# EAGLE board X13_Power_Distribution_D1 (EAGLE 9.6.2)
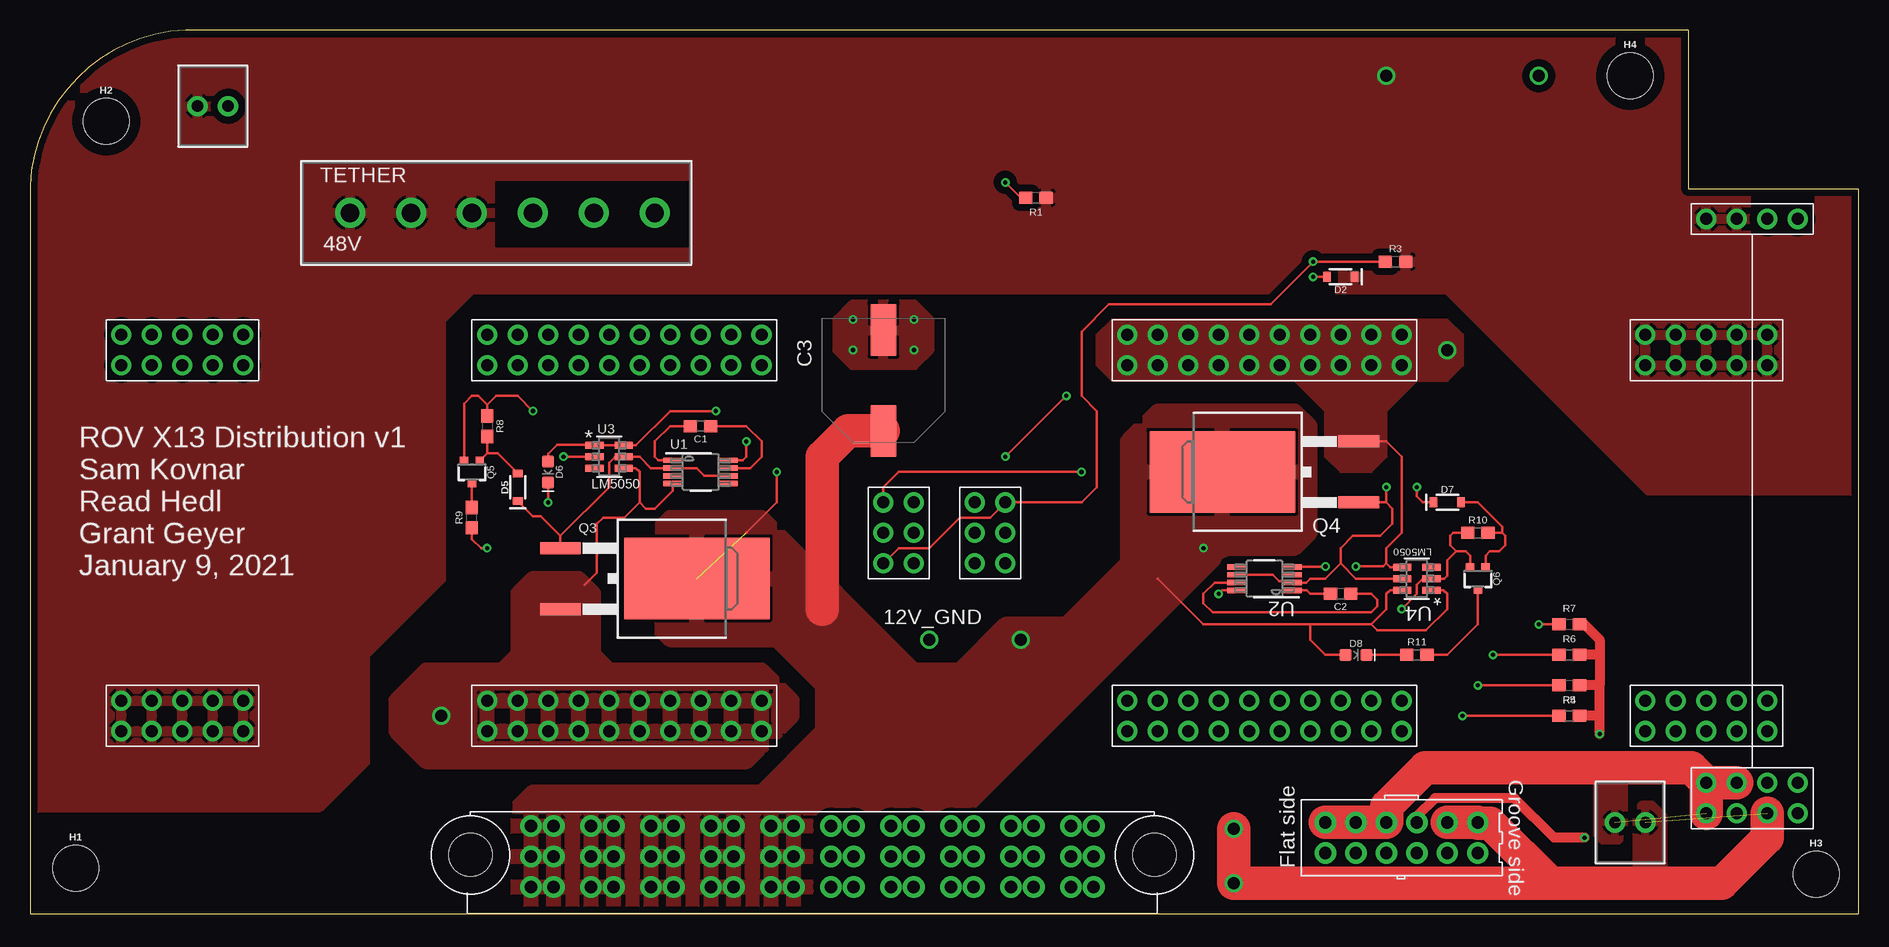
[diagram p0: board, top side]
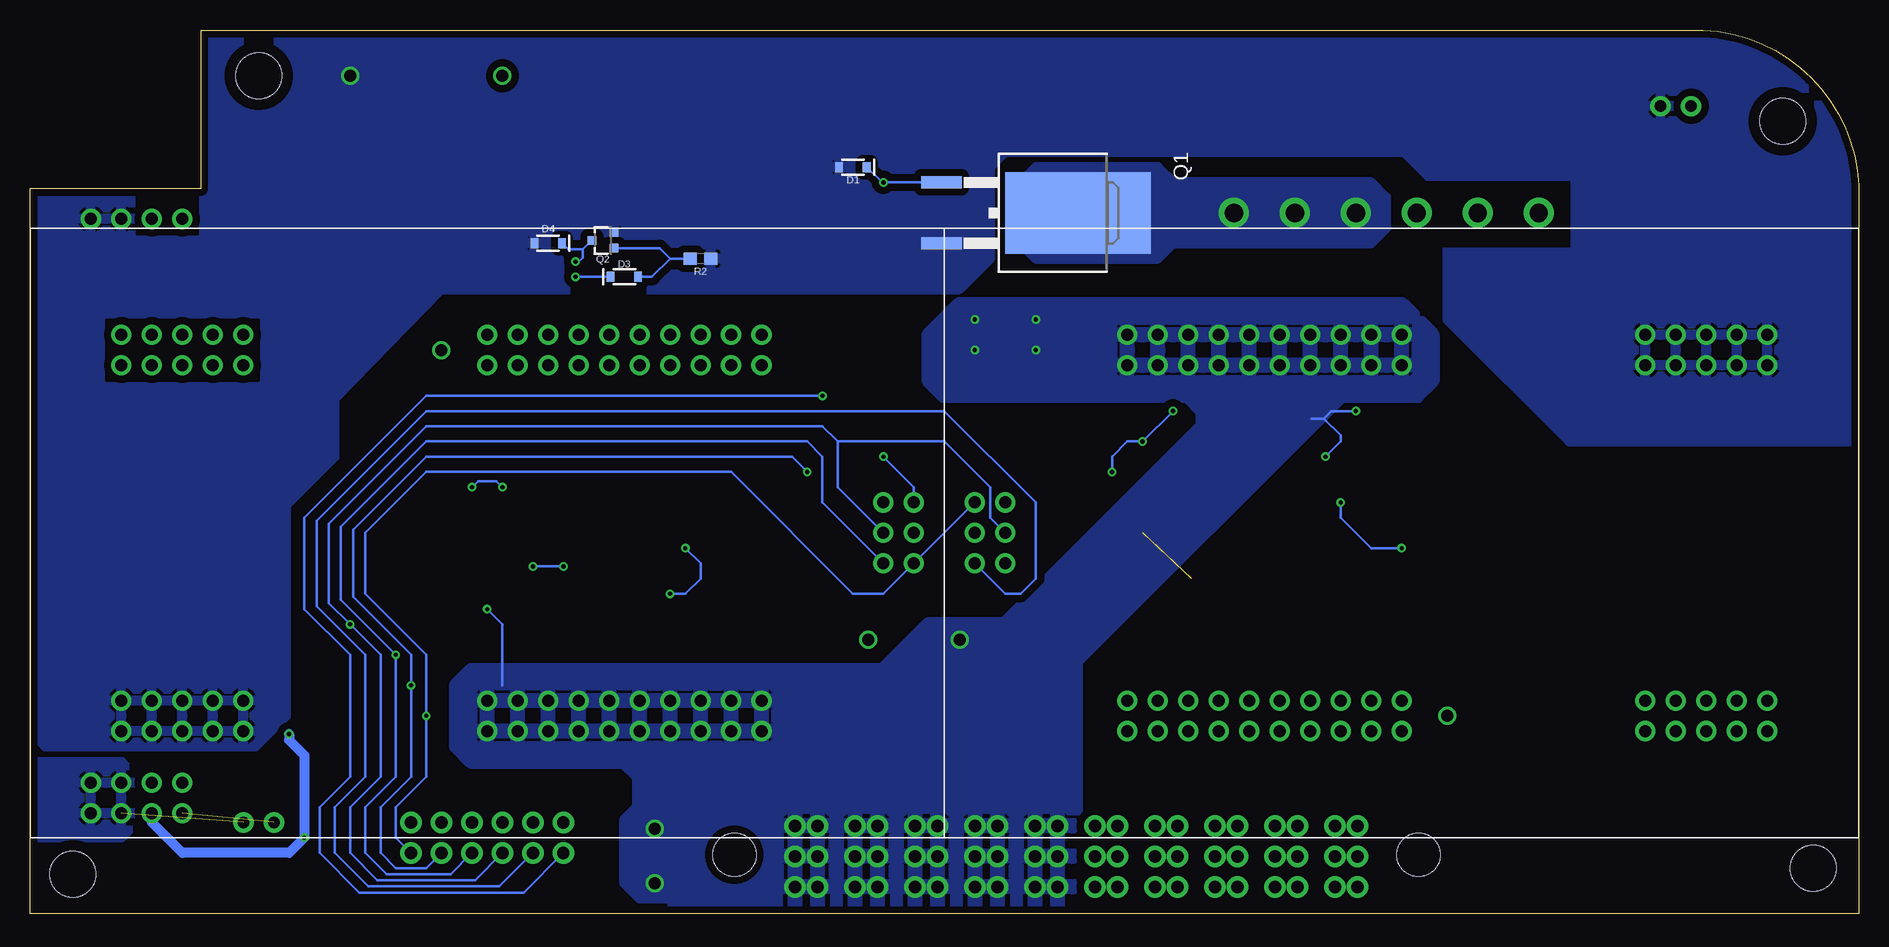
[diagram p1: board, bottom side, seen from below]

Size 152.4 x 73.66 mm. Coordinates in mm from the lower left corner, seen from the top.
Outline: 0,0 152.4,0 152.4,60.45 138.18,60.45 138.18,73.66 14.22,73.66 arc90 0,60.71 0,0
Copper layers (1*16): Top 0.0356mm / dielectric 1.5011mm / Bottom 0.0356mm
Design rules "ECE_Senior_Design": minimum track width 8mil, minimum drill 13mil, track to track 8mil, track to pad 8mil, pad to pad 6mil, via to via 8mil, smd to smd 6mil, copper to edge 15mil, drill to drill 8mil, minimum pad ring 7mil, minimum via ring 7mil, stop-mask expansion 3mil, vias tented up to drill 0mil, thermal gap 10mil
Net classes: 0 default: width 0.203 mm, clearance 0.205 mm

## Footprints (pad centres in the part's own frame; a part is rotated, then mirrored left to right if it is on the bottom)
CONN2_282834-2_TEC = drill 0.965 pad 1.7: 1 0,0; 2 2.54,0
IPL1-106-01-L-D-K = drill 1.016 pad 1.778: 1 0,0; 2 2.54,0; 3 5.08,0; 4 7.62,0; 5 10.16,0; 6 12.7,0; 7 0,-2.54; 8 2.54,-2.54; 9 5.08,-2.54; 10 7.62,-2.54; 11 10.16,-2.54; 12 12.7,-2.54
MPPT-10-01-01-L-RA-SD = drill 1.04 pad 1.8: 1@1 -23.44,2.26; 1@2 -21.56,2.26; 1@3 -23.44,4.8; 1@4 -21.56,4.8; 1@5 -23.44,7.34; 1@6 -21.56,7.34; 2@1 -18.44,2.26; 2@2 -16.56,2.26; 2@3 -18.44,4.8; 2@4 -16.56,4.8; 2@5 -18.44,7.34; 2@6 -16.56,7.34; 3@1 -13.44,2.26; 3@2 -11.56,2.26; 3@3 -13.44,4.8; 3@4 -11.56,4.8; 3@5 -13.44,7.34; 3@6 -11.56,7.34; 4@1 -8.44,2.26; 4@2 -6.56,2.26; 4@3 -8.44,4.8; 4@4 -6.56,4.8; 4@5 -8.44,7.34; 4@6 -6.56,7.34; 5@1 -3.44,2.26; 5@2 -1.56,2.26; 5@3 -3.44,4.8; 5@4 -1.56,4.8; 5@5 -3.44,7.34; 5@6 -1.56,7.34; 6@1 1.56,2.26; 6@2 3.44,2.26; 6@3 1.56,4.8; 6@4 3.44,4.8; 6@5 1.56,7.34; 6@6 3.44,7.34; 7@1 6.56,2.26; 7@2 8.44,2.26; 7@3 6.56,4.8; 7@4 8.44,4.8; 7@5 6.56,7.34; 7@6 8.44,7.34; 8@1 11.56,2.26; 8@2 13.44,2.26; 8@3 11.56,4.8; 8@4 13.44,4.8; 8@5 11.56,7.34; 8@6 13.44,7.34; 9@1 16.56,2.26; 9@2 18.44,2.26; 9@3 16.56,4.8; 9@4 18.44,4.8; 9@5 16.56,7.34; 9@6 18.44,7.34; 10@1 21.56,2.26; 10@2 23.44,2.26; 10@3 21.56,4.8; 10@4 23.44,4.8; 10@5 21.56,7.34; 10@6 23.44,7.34 | hole 3.6: 28.5,4.93; -28.5,4.93
DIST2BRICK_D2 = drill 1 pad 1.676: 1@1 -30.48,-16.51; 1@2 -30.48,-13.97; 1@3 -27.94,-16.51; 1@4 -27.94,-13.97; 1@5 -25.4,-16.51; 1@6 -25.4,-13.97; 1@7 -22.86,-16.51; 1@8 -22.86,-13.97; 1@9 -20.32,-16.51; 1@10 -20.32,-13.97; 2@1 0,-16.51; 2@2 0,-13.97; 2@3 2.54,-16.51; 2@4 2.54,-13.97; 2@5 5.08,-16.51; 2@6 5.08,-13.97; 2@7 7.62,-16.51; 2@8 7.62,-13.97; 2@9 10.16,-16.51; 2@10 10.16,-13.97; 2@11 12.7,-16.51; 2@12 12.7,-13.97; 2@13 15.24,-16.51; 2@14 15.24,-13.97; 2@15 17.78,-16.51; 2@16 17.78,-13.97; 2@17 20.32,-13.97; 2@18 22.86,-13.97; 2@19 22.86,-16.51; 2@20 20.32,-16.51; 3@1 -30.48,13.97; 3@2 -30.48,16.51; 3@3 -27.94,13.97; 3@4 -27.94,16.51; 3@5 -25.4,13.97; 3@6 -25.4,16.51; 3@7 -22.86,13.97; 3@8 -22.86,16.51; 3@9 -20.32,13.97; 3@10 -20.32,16.51; 4@1 0,13.97; 4@2 0,16.51; 4@3 2.54,13.97; 4@4 2.54,16.51; 4@5 5.08,13.97; 4@6 5.08,16.51; 4@7 7.62,13.97; 4@8 7.62,16.51; 4@9 10.16,13.97; 4@10 10.16,16.51; 4@11 12.7,13.97; 4@12 12.7,16.51; 4@13 15.24,13.97; 4@14 15.24,16.51; 4@15 17.78,13.97; 4@16 17.78,16.51; 4@17 20.32,16.51; 4@18 22.86,16.51; 4@19 22.86,13.97; 4@20 20.32,13.97; A 35.56,-2.54; B 33.02,-2.54; C 33.02,0; D 33.02,2.54; E 35.56,2.54; F 35.56,0
0603 = smd 1.1 x 1: 1 -0.85,0; 2 0.85,0
CAPAE1030X1050N = smd 4.3 x 2.15: + -4.2,0; - 4.2,0
DIST2CON = drill 1 pad 1.676: 1@1 -3.81,22.86; 1@2 -1.27,22.86; 2@1 1.27,22.86; 2@2 3.81,22.86; 3@1 -3.81,-26.67; 3@2 -3.81,-24.13; 3@3 -1.27,-24.13; 4 -1.27,-26.67; 5@1 1.27,-26.67; 5@2 1.27,-24.13; 5@3 3.81,-26.67; 5@4 3.81,-24.13
SOD-323 = smd 0.63 x 0.83: A 1.15,0; C -1.15,0
LED-0603 = smd 1 x 1: A -0.877,0; C 0.877,0
6-32-HOLE = hole 3.81: 0,0
TO263 = smd 1 x 3.4: 1 -2.54,-6.6; 2 2.54,-6.6 | smd 6.8 x 12.14: 3 0,4.77
SOT323 = smd 0.7 x 0.7: 1 -0.65,-0.925; 2 0.65,-0.925; 3 0,0.925
CON6_P5MM_VER_TERM-BLK_TYC = drill 1.524 pad 2.5: 1 0,0; 2 5.08,0; 3 10.16,0; 4 15.24,0; 5 20.32,0; 6 25.4,0
DGK0008A_M = smd 1.55 x 0.45: 1 -2.325,0.975; 2 -2.325,0.325; 3 -2.325,-0.325; 4 -2.325,-0.975; 5 2.325,-0.975; 6 2.325,-0.325; 7 2.325,0.325; 8 2.325,0.975
MK06A-M = smd 1.524 x 0.584: 1 -1.219,0.95; 2 -1.219,0; 3 -1.219,-0.95; 4 1.219,-0.95; 5 1.219,0; 6 1.219,0.95

## Placement (x,y rotation side)
5V_POE  POE_TERMINAL  [CONN2_282834-2_TEC]  132.08,7.62 0 top
48V_POE  POE_TERMINAL  [CONN2_282834-2_TEC]  13.97,67.31 0 top
BACKPLANE_LOGIC  IPL1-106-01-L-D-K  [IPL1-106-01-L-D-K]  107.95,7.62 0 top
BACKPLANE_PWR  [MPPT-10-01-01-L-RA-SD]  65.2,0 0 top
BRICK1  DIST2BRICKVER_D2  [DIST2BRICK_D2]  38.1,31.75 0 top
BRICK2  DIST2BRICKVER_D2  [DIST2BRICK_D2]  114.3,31.75 180 top
C1  2.2uF  [0603]  55.88,40.64 180 top
C2  2.2uF  [0603]  109.22,26.67 180 top
C3  330uF  [CAPAE1030X1050N]  71.12,44.45 90 top
CONVERSION  DIST2CON  [DIST2CON]  143.51,35.05 0 top
D1  15V  [SOD-323]  83.82,62.23 180 bottom
D2  22V  [SOD-323]  109.22,53.09 180 top
D3  22V  [SOD-323]  102.87,53.09 0 bottom
D4  5V  [SOD-323]  109.22,55.88 180 bottom
D5  15V  [SOD-323]  40.64,35.56 90 top
D6  [LED-0603]  43.18,36.83 270 top
D7  15V  [SOD-323]  118.11,34.29 0 top
D8  [LED-0603]  110.49,21.59 0 top
H1  6-32-HOLE  [6-32-HOLE]  3.81,3.81 0 top
H2  6-32-HOLE  [6-32-HOLE]  6.35,66.04 0 top
H3  6-32-HOLE  [6-32-HOLE]  148.84,3.3 0 top
H4  6-32-HOLE  [6-32-HOLE]  133.35,69.85 0 top
Q1  IRF1018EPBF  [TO263]  69.85,58.42 270 bottom
Q2  SSM3K341R  [SOT323]  104.65,56.13 90 bottom
Q3  IRF1018EPBF  [TO263]  50.8,27.94 270 top
Q4  IRF1018EPBF  [TO263]  104.14,36.83 90 top
Q5  SSM3K341R  [SOT323]  36.83,36.83 180 top
Q6  SSM3K341R  [SOT323]  120.65,27.94 180 top
R1  1M  [0603]  83.82,59.69 0 top
R2  1M  [0603]  96.52,54.61 180 bottom
R3  10k  [0603]  113.79,54.36 0 top
R4  10k  [0603]  128.27,16.51 0 top
R5  10k  [0603]  128.27,19.05 0 top
R6  10k  [0603]  128.27,21.59 0 top
R7  10k  [0603]  128.27,24.13 0 top
R8  1M  [0603]  38.1,40.64 270 top
R9  470  [0603]  36.83,33.02 90 top
R10  1M  [0603]  120.65,31.75 0 top
R11  470  [0603]  115.57,21.59 0 top
TETHER  48V  [CON6_P5MM_VER_TERM-BLK_TYC]  26.67,58.42 0 top
U1  LM74610  [DGK0008A_M]  55.88,36.83 0 top
U2  LM74610  [DGK0008A_M]  102.87,27.94 180 top
U3  LM5050  [MK06A-M]  48.26,38.1 0 top
U4  LM5050  [MK06A-M]  115.57,27.94 180 top

## Library data of the parts
5V_POE 48V_POE = Dist_POE; BUILT_BY: EMA_UL_Team; COPYRIGHT: Copyright (C) 2016 Accelerated Designs. All rights reserved; DESCRIPTION: TERMI-BLOK PCB MOUNT, 90 2P.; MANUFACTURER_PART_NUMBER: 282834-2; PITCH_MM_: 2.54; POSITIONS: 2; PRODUCT: Terminal Block Headers & Receptacles; ROWS-CONFIG: 1; SOURCELIBRARY: TE_Connectivity-2018-03-16; TE_PART_NUMBER: 282834-2; TYPE: Receptacle; VENDOR: TE Connectivity
BACKPLANE_LOGIC = Backplane_Dist_Logic_Connector
BACKPLANE_PWR = Samtec MPPT Hermaphoditic 10 pos - MPPT-10-01-01-L-RA-SD
BRICK1 BRICK2 = Brick_Dist_Connector
C1 C2 = SparkFun-Capacitors; PROD_ID: CAP-08390
C3 = brick-capacitor-UCM1H331MNL1GS; ARROW_PART_NUMBER: UCM1H331MNL1GS; ARROW_PRICE-STOCK: https://www.arrow.com/en/products/ucm1h331mnl1gs/nichicon; DESCRIPTION: Nichicon 330uF 50 V Aluminium Electrolytic Capacitor SMD, CM Series 2000h 10 (Dia.) x 10mm; HEIGHT: 10.5mm; MANUFACTURER_NAME: Nichicon; MANUFACTURER_PART_NUMBER: UCM1H331MNL1GS; MOUSER_PART_NUMBER: 647-UCM1H331MNL1GS; MOUSER_PRICE-STOCK: https://www.mouser.co.uk/ProductDetail/Nichicon/UCM1H331MNL1GS?qs=DSgADHjnLTkTovFLdbC%252BNg%3D%3D
CONVERSION = Dist_Convert_Connector
D1-D5 D7 = SparkFun-DiscreteSemi; PROD_ID: DIO-08199
D6 D8 = SparkFun-LED
H1-H4 = Mounting Holes
Q1 Q3 Q4 = Reverse_Voltage_NMOS
Q2 Q5 Q6 = SparkFun-DiscreteSemi; PROD_ID: TRANS-11151
R1 R4-R7 R9 R11 = SparkFun-Resistors
R2 R3 R8 R10 = SparkFun-Resistors; SPICEPREFIX: R
TETHER = Dist_To_Tether_Connector; BUILT_BY: EMA_UL_Team; MANUFACTURER_PART_NUMBER: 796636-6; SOURCELIBRARY: Tyco_2012-04-26; VENDOR: TE Connectivity
U1 U2 = Dist_OR_Controller; APPLICATION_BUILDNUMBER: *; COMPTYPE: IC; MANUFACTURER: Texas Instruments; MOUNTTYPE: SMT; PACKAGEREFERENCE: DGK0008A; PARTNUMBER: LM74610QDGKRQ1; PIN_COUNT: 8; REFDES: RefDes; TYPE: TYPE
U3 U4 = Dist_OR_Controller; BASEPN: LM5050-1; DATASHEETURL: http://www.ti.com/lit/ds/symlink/lm5050-1.pdf; DESCRIPTION: High Side OR-ing FET Controller; MANUFACTURER: Texas Instruments; MANUFACTURER_PART_NUMBER: LM5050MK-1/NOPB; NSC_PACKAGEREFERENCE: MK06A; VENDOR: Texas Instruments

## Nets
5V_GND: 5V_POE.2 BACKPLANE_LOGIC.5 BACKPLANE_LOGIC.6 CONVERSION.5@1 CONVERSION.5@2 CONVERSION.5@3 CONVERSION.5@4
12V_GND: BACKPLANE_PWR.6@1 BACKPLANE_PWR.6@2 BACKPLANE_PWR.6@3 BACKPLANE_PWR.6@4 BACKPLANE_PWR.6@5 BACKPLANE_PWR.6@6 BACKPLANE_PWR.7@1 BACKPLANE_PWR.7@2 BACKPLANE_PWR.7@3 BACKPLANE_PWR.7@4 BACKPLANE_PWR.7@5 BACKPLANE_PWR.7@6 BACKPLANE_PWR.8@1 BACKPLANE_PWR.8@2 BACKPLANE_PWR.8@3 BACKPLANE_PWR.8@4 BACKPLANE_PWR.8@5 BACKPLANE_PWR.8@6 BACKPLANE_PWR.9@1 BACKPLANE_PWR.9@2 BACKPLANE_PWR.9@3 BACKPLANE_PWR.9@4 BACKPLANE_PWR.9@5 BACKPLANE_PWR.9@6 BACKPLANE_PWR.10@1 BACKPLANE_PWR.10@2 BACKPLANE_PWR.10@3 BACKPLANE_PWR.10@4 BACKPLANE_PWR.10@5 BACKPLANE_PWR.10@6 BRICK1.4@1 BRICK1.4@2 BRICK1.4@3 BRICK1.4@4 BRICK1.4@5 BRICK1.4@6 BRICK1.4@7 BRICK1.4@8 BRICK1.4@9 BRICK1.4@10 BRICK1.4@11 BRICK1.4@12 BRICK1.4@13 BRICK1.4@14 BRICK1.4@15 BRICK1.4@16 BRICK1.4@17 BRICK1.4@18 BRICK1.4@19 BRICK1.4@20 BRICK2.4@1 BRICK2.4@2 BRICK2.4@3 BRICK2.4@4 BRICK2.4@5 BRICK2.4@6 BRICK2.4@7 BRICK2.4@8 BRICK2.4@9 BRICK2.4@10 BRICK2.4@11 BRICK2.4@12 BRICK2.4@13 BRICK2.4@14 BRICK2.4@15 BRICK2.4@16 BRICK2.4@17 BRICK2.4@18 BRICK2.4@19 BRICK2.4@20 C3.- Q5.2 Q6.2 R8.1 R10.1 U3.2 U4.2
48V_GND: 48V_POE.2 BRICK1.3@1 BRICK1.3@2 BRICK1.3@3 BRICK1.3@4 BRICK1.3@5 BRICK1.3@6 BRICK1.3@7 BRICK1.3@8 BRICK1.3@9 BRICK1.3@10 BRICK2.3@1 BRICK2.3@2 BRICK2.3@3 BRICK2.3@4 BRICK2.3@5 BRICK2.3@6 BRICK2.3@7 BRICK2.3@8 BRICK2.3@9 BRICK2.3@10 CONVERSION.2@1 CONVERSION.2@2 D1.A D4.A Q1.2 Q2.2 R2.1
+3.3V: BACKPLANE_LOGIC.4 CONVERSION.4 R4.2 R5.2 R6.2 R7.2
+5V: 5V_POE.1 BACKPLANE_LOGIC.1 BACKPLANE_LOGIC.2 BACKPLANE_LOGIC.3 CONVERSION.3@1 CONVERSION.3@2 CONVERSION.3@3
+12V: BACKPLANE_PWR.1@1 BACKPLANE_PWR.1@2 BACKPLANE_PWR.1@3 BACKPLANE_PWR.1@4 BACKPLANE_PWR.1@5 BACKPLANE_PWR.1@6 BACKPLANE_PWR.2@1 BACKPLANE_PWR.2@2 BACKPLANE_PWR.2@3 BACKPLANE_PWR.2@4 BACKPLANE_PWR.2@5 BACKPLANE_PWR.2@6 BACKPLANE_PWR.3@1 BACKPLANE_PWR.3@2 BACKPLANE_PWR.3@3 BACKPLANE_PWR.3@4 BACKPLANE_PWR.3@5 BACKPLANE_PWR.3@6 BACKPLANE_PWR.4@1 BACKPLANE_PWR.4@2 BACKPLANE_PWR.4@3 BACKPLANE_PWR.4@4 BACKPLANE_PWR.4@5 BACKPLANE_PWR.4@6 BACKPLANE_PWR.5@1 BACKPLANE_PWR.5@2 BACKPLANE_PWR.5@3 BACKPLANE_PWR.5@4 BACKPLANE_PWR.5@5 BACKPLANE_PWR.5@6 C3.+ D6.A D8.A Q3.3 Q4.3 U1.8 U2.8 U3.1 U3.6 U4.1 U4.6
+12V_A: BRICK1.2@1 BRICK1.2@2 BRICK1.2@3 BRICK1.2@4 BRICK1.2@5 BRICK1.2@6 BRICK1.2@7 BRICK1.2@8 BRICK1.2@9 BRICK1.2@10 BRICK1.2@11 BRICK1.2@12 BRICK1.2@13 BRICK1.2@14 BRICK1.2@15 BRICK1.2@16 BRICK1.2@17 BRICK1.2@18 BRICK1.2@19 BRICK1.2@20 Q3.2 U1.4 U3.4
+12V_B: BRICK2.2@1 BRICK2.2@2 BRICK2.2@3 BRICK2.2@4 BRICK2.2@5 BRICK2.2@6 BRICK2.2@7 BRICK2.2@8 BRICK2.2@9 BRICK2.2@10 BRICK2.2@11 BRICK2.2@12 BRICK2.2@13 BRICK2.2@14 BRICK2.2@15 BRICK2.2@16 BRICK2.2@17 BRICK2.2@18 BRICK2.2@19 BRICK2.2@20 Q4.2 U2.4 U4.4
+48V: 48V_POE.1 BRICK1.1@1 BRICK1.1@2 BRICK1.1@3 BRICK1.1@4 BRICK1.1@5 BRICK1.1@6 BRICK1.1@7 BRICK1.1@8 BRICK1.1@9 BRICK1.1@10 BRICK2.1@1 BRICK2.1@2 BRICK2.1@3 BRICK2.1@4 BRICK2.1@5 BRICK2.1@6 BRICK2.1@7 BRICK2.1@8 BRICK2.1@9 BRICK2.1@10 CONVERSION.1@1 CONVERSION.1@2 D2.C R1.2 R3.2 TETHER.1 TETHER.2 TETHER.3
ALERT_1: BACKPLANE_LOGIC.11 BRICK1.D R5.1
ALERT_2: BACKPLANE_LOGIC.10 BRICK2.D R6.1
C2_1: BACKPLANE_LOGIC.8 BRICK1.A
C2_2: BACKPLANE_LOGIC.7 BRICK2.A
CLK: BACKPLANE_LOGIC.9 BRICK1.C BRICK2.C R7.1
DATA: BACKPLANE_LOGIC.12 BRICK1.E BRICK2.E R4.1
GND_RAW: Q1.3 TETHER.4 TETHER.5 TETHER.6
LED_DRIVE_A: D5.A Q5.1 R8.2
LED_DRIVE_B: D7.A Q6.1 R10.2
N$1: D2.A D3.C
N$4: Q5.3 R9.2
N$5: D6.C R9.1
N$6: Q6.3 R11.2
N$7: D8.C R11.1
ON/OFF: BRICK1.B BRICK2.B D4.C Q2.3 R3.1
ON/OFF_DRIVE: D3.A Q2.1 R2.2
OR_DRIVE_A: D5.C Q3.1 U1.2 U1.6 U3.5
OR_DRIVE_B: D7.C Q4.1 U2.2 U2.6 U4.5
REV_DRIVE: D1.C Q1.1 R1.1
VCAPH_A: C1.1 U1.7
VCAPH_B: C2.1 U2.7
VCAPL_A: C1.2 U1.1
VCAPL_B: C2.2 U2.1

## Tracks (layer width: path | path; a pad name or v marks a point on that pad's centre or on a via)
5V_GND  (via drill 1)  (1 unrouted)
  Top 2.794: CONVERSION.5@1 144.78,6.35 140.97,2.54 126.71,2.54 | 126.71,2.54 121.68,7.57 120.7,7.57 BACKPLANE_LOGIC.6 BACKPLANE_LOGIC.5 | 126.71,2.54 v100.33,2.54 v100.33,7.11
  pour Top: 133.86,8.64 134.37,9.14 135.13,9.14 136.14,8.13 136.14,4.06 135.38,3.3 134.37,3.3 133.86,3.81
  pour Bottom (isolate 0.61): 99.06,1.27 101.6,1.27 102.87,2.54 102.87,7.87 101.09,9.65 98.55,9.65 97.79,8.89 97.79,2.54
  pour Bottom (isolate 0.61): 143.51,7.62 144.78,6.35 155.7,6.35 162.05,12.7 144.78,12.7 143.51,11.43
12V_GND  (via drill 0.35, 1)
  Top 0.203: Q6.2 120,29.86 119.63,30.23 118.87,30.23 | 118.87,30.23 118.36,30.73 118.36,31.5 118.62,31.75 R10.1 | 118.87,30.23 118.11,29.46 118.11,28.19 117.86,27.94 U4.2 116.08,27.94 115.57,27.43 115.57,26.67 v114.3,25.4 | U3.2 v44.45,38.1 | R8.1 38.1,42.42 | 38.1,42.42 38.86,43.18 40.64,43.18 v41.91,41.91 | Q5.2 36.18,42.53 36.83,43.18 37.34,43.18 38.1,42.42
  Bottom 0.203: v114.3,25.4 113.03,24.13 113.03,19.05 | v44.45,38.1 43.18,39.37 43.18,39.88 44.58,41.27 | 44.58,41.27 45.59,41.27 | v41.91,41.91 43.94,41.91 44.58,41.27
  other vias: 68.58,49.53 68.58,46.99 73.66,46.99 73.66,49.53 74.93,22.86
  pour Bottom (isolate 0.61): 65.28,-5.08 101.6,-5.08 101.6,11.43 102.87,12.7 115.57,12.7 116.84,13.97 116.84,19.05 115.57,20.32 81.28,20.32 77.47,24.13 71.12,24.13 54.61,40.64 54.61,41.91 55.88,43.18 76.2,43.18 77.47,44.45 77.47,48.26 74.93,50.8 38.1,50.8 35.56,48.26 35.56,44.45 36.83,43.18 43.18,43.18 65.28,21.08
  pour Top: 67.31,49.53 68.58,50.8 73.66,50.8 74.93,49.53 74.93,46.99 73.66,45.72 68.58,45.72 67.31,46.99
48V_GND  (via drill 1)
  other vias: 125.73,69.85
  pour Bottom (isolate 0.61): 37.92,63.5 34.29,59.87 34.29,49.53 24.13,39.37 0,39.37 0,67.31 10.16,77.47 148.59,77.47 160.02,66.04 160.02,22.86 151.13,13.97 133.6,13.97 131.06,16.51 131.06,34.04 127,38.1 127,42.95 118.11,52.07 74.93,52.07 72.39,54.61 72.39,62.23 71.12,63.5
  cutout Bottom: 133.35,49.53 146.05,49.53 146.05,44.45 133.35,44.45
  cutout Bottom: 138.43,59.18 138.43,56.64 143.51,56.64 143.51,59.18
  pour Bottom (isolate 0.61, no thermals): 73.66,57.15 73.66,54.61 74.93,53.34 88.9,53.34 90.17,54.61 90.17,57.15 88.9,58.42 74.93,58.42
  cutout Bottom (isolate 0.61, no thermals): 24.13,57.91 24.13,55.63 38.61,55.63 38.61,60.96 24.13,60.96
+3.3V  (via drill 0.35)
  Top 0.813: 130.81,16.51 130.81,19.05 | 130.81,21.59 130.81,19.05 | 130.81,21.59 130.81,22.86 129.54,24.13 R7.2 | BACKPLANE_LOGIC.4 115.57,8.13 117.09,9.65 123.7,9.65 127,6.35 v129.54,6.35 | v130.81,14.99 130.81,16.51 | 130.81,19.05 R5.2 | 130.81,21.59 R6.2 | 130.81,16.51 R4.2
  Bottom 0.813: v130.81,14.99 130.81,14.48 129.54,13.21 v129.54,6.35 130.81,5.08 139.7,5.08 142.24,7.62 CONVERSION.4
+5V  (1 unrouted)
  Top 2.794: CONVERSION.3@1 CONVERSION.3@2 | CONVERSION.3@3 CONVERSION.3@2 | BACKPLANE_LOGIC.1 BACKPLANE_LOGIC.2 BACKPLANE_LOGIC.3 113.08,7.67 113.08,8.98 116.29,12.19 138.43,12.19 CONVERSION.3@2
  pour Top: 130.56,10.92 130.56,6.6 131.06,6.1 132.33,6.1 132.84,6.6 132.84,11.68 131.32,11.68
+12V  (via drill 0.35, 1)  (1 unrouted)
  Top 0.203: U2.8 99.36,26.96 v99.06,26.67 | 111.76,24.13 106.68,24.13 | 106.68,24.13 97.79,24.13 93.98,27.94 | U4.6 113.35,26.99 113.03,26.67 113.03,25.4 111.76,24.13 | U4.1 117.79,26.99 118.11,26.67 118.11,25.4 116.33,23.62 112.27,23.62 111.76,24.13 | 106.68,24.13 106.68,22.86 107.95,21.59 D8.A | U1.8 59.4,37.8 59.69,38.1 v59.69,39.37 | v57.15,41.91 53.34,41.91 50.48,39.05 U3.6 U3.1 46.98,39.12 43.94,39.12 43.18,38.35 D6.A | v62.23,36.83 62.23,34.29 59.69,31.75
  Top 2.794: C3.+ 68.19,40.25 66.04,38.1 66.04,25.4
  Bottom 0.203: v99.06,26.67 97.79,26.67 96.52,27.94 96.52,29.21 v97.79,30.48 | v57.15,41.91 v59.69,39.37 60.96,39.37 62.23,38.1 v62.23,36.83
  other vias: 82.55,22.86
  pour Top (isolate 0.61): 50.8,30.48 50.8,25.4 53.34,22.86 62.23,22.86 66.04,19.05 66.04,15.24 60.96,10.16 41.91,10.16 40.64,8.89 40.64,-5.08 64.01,-5.08 99.57,30.48 105.41,30.48 106.68,31.75 106.68,40.64 105.41,41.91 93.98,41.91 91.44,39.37 91.44,29.21 86.36,24.13 81.28,24.13 77.47,20.32 73.66,20.32 60.96,33.02 53.34,33.02
+12V_A  (via drill 1)
  Top 0.203: U3.4 50.48,37.15 50.8,36.83 50.8,34.29 | 50.8,34.29 51.31,33.78 52.07,33.78 53.55,35.27 U1.4 | 50.8,34.29 49.53,33.02 47.75,33.02 47.24,32.51 47.24,28.45 46.23,27.43
  other vias: 34.29,16.51
  pour Top (isolate 0.61): 59.69,12.7 63.5,16.51 63.5,17.78 60.96,20.32 48.26,20.32 46.99,21.59 46.99,26.67 45.72,27.94 41.91,27.94 40.64,26.67 40.64,21.59 39.37,20.32 33.02,20.32 30.48,17.78 30.48,15.24 33.02,12.7
  pour Top (isolate 0.61, no thermals): 41.4,25.65 42.16,26.42 45.97,26.42 46.23,26.42 46.74,25.91 46.74,24.64 45.97,23.88 42.16,23.88 41.91,23.88 41.4,24.38
+12V_B  (via drill 0.35, 1)
  Top 0.203: Q4.2 113.03,39.37 114.3,38.1 114.3,31.75 113.03,30.48 113.03,29.21 | U4.4 113.35,28.89 113.03,29.21 | v107.95,28.96 107.91,28.91 U2.4 | v110.49,28.96 112.78,28.96 113.03,29.21
  Bottom 0.203: v110.49,28.96 v107.95,28.96
  other vias: 118.11,46.99
  pour Top (isolate 0.61, no thermals): 118.11,49.53 90.17,49.53 88.9,48.26 88.9,45.72 90.17,44.45 105.41,44.45 107.95,41.91 107.95,38.1 109.22,36.83 111.76,36.83 113.03,38.1 113.03,41.91 115.57,44.45 118.11,44.45 119.38,45.72 119.38,48.26
+48V  (via drill 1)
  other vias: 113.03,69.85
  pour Top (isolate 0.61): 24.13,8.89 27.94,12.7 27.94,21.59 34.29,27.94 34.29,49.53 36.83,52.07 118.11,52.07 134.87,35.31 154.94,35.31 154.94,69.85 148.59,76.2 3.81,76.2 -2.54,69.85 -2.54,8.89
  cutout Top: 6.35,49.53 19.05,49.53 19.05,44.45 6.35,44.45
  cutout Top: 143.51,59.18 143.51,56.64 148.59,56.64 148.59,59.18
  cutout Top (isolate 0.61, no thermals): 38.86,60.96 38.86,55.63 54.86,55.63 54.86,60.96
ALERT_1  (via drill 0.35)
  Top 0.203: R5.1 v120.65,19.05 | BRICK1.D 71.12,35.56 72.39,36.83 v87.63,36.83
  Bottom 0.203: v87.63,36.83 88.9,38.1 119.38,38.1 125.48,32 125.48,26.42 120.65,21.59 v120.65,19.05 120.65,11.43 123.19,8.89 123.19,5.08 121.92,3.81 119.38,3.81 BACKPLANE_LOGIC.11
ALERT_2  (via drill 0.35)
  Top 0.203: R6.1 v121.92,21.59
  Bottom 0.203: BRICK2.D 86.36,34.29 86.36,38.1 87.63,39.37 119.38,39.37 126.49,32.26 126.49,26.16 v121.92,21.59 121.92,11.43 124.46,8.89 124.46,5.08 122.68,3.3 117.35,3.3 BACKPLANE_LOGIC.10
C2_1
  Bottom 0.203: BRICK1.A 71.12,26.67 69.85,26.67 68.58,27.94 68.58,34.29 76.2,41.91 119.38,41.91 128.52,32.77 128.52,25.65 124.46,21.59 124.46,11.43 127,8.89 127,5.08 124.21,2.29 113.28,2.29 BACKPLANE_LOGIC.8
C2_2  (via drill 0.35)
  Top 0.203: v86.36,43.18 v81.28,38.1
  Bottom 0.203: v86.36,43.18 119.38,43.18 129.54,33.02 129.54,25.4 125.73,21.59 125.73,11.43 128.27,8.89 128.27,5.08 124.97,1.78 111.25,1.78 BACKPLANE_LOGIC.7 | v81.28,38.1 78.74,35.56 BRICK2.A
CLK  (via drill 0.35)
  Top 0.203: R7.1 v125.73,24.13
  Bottom 0.203: 85.09,39.37 86.36,40.64 119.38,40.64 127.51,32.51 127.51,25.91 v125.73,24.13 123.19,21.59 123.19,11.43 125.73,8.89 125.73,5.08 123.44,2.79 115.32,2.79 BACKPLANE_LOGIC.9 | 85.09,39.37 85.09,35.56 BRICK2.C | 85.09,39.37 76.2,39.37 72.39,35.56 72.39,33.02 BRICK1.C
DATA  (via drill 0.35)
  Top 0.203: R4.1 v119.38,16.51
  Bottom 0.203: BRICK1.E BRICK2.E 81.28,26.67 83.82,26.67 93.98,36.83 119.38,36.83 124.46,31.75 124.46,26.67 119.38,21.59 v119.38,16.51 119.38,11.43 121.92,8.89 121.92,6.35 BACKPLANE_LOGIC.12
GND_RAW
  pour Bottom (isolate 0.61, no thermals): 57.15,60.96 58.42,62.23 68.58,62.23 69.85,60.96 69.85,55.88 68.58,54.61 58.42,54.61 57.15,55.88 40.64,55.88 39.37,57.15 39.37,59.69 40.64,60.96
LED_DRIVE_A
  Top 0.203: Q5.1 38.1,38.38 | 38.1,38.38 R8.2 | D5.A 38.98,38.38 38.1,38.38
LED_DRIVE_B
  Top 0.203: Q6.1 121.3,29.86 121.67,30.23 122.43,30.23 122.94,30.73 122.94,31.5 122.68,31.75 | R10.2 122.68,31.75 | 122.68,31.75 122.68,32.26 120.65,34.29 D7.A
N$1  (via drill 0.35)
  Top 0.203: D2.A v106.93,53.09
  Bottom 0.203: v106.93,53.09 D3.C
N$4
  Top 0.203: R9.2 Q5.3
N$5  (via drill 0.35)
  Top 0.203: R9.1 36.83,31.24 37.59,30.48 v38.1,30.48 | v43.18,34.29 D6.C
  Bottom 0.203: v38.1,30.48 40.64,30.48 43.18,33.02 v43.18,34.29
N$6
  Top 0.203: R11.2 118.11,21.59 120.65,24.13 Q6.3
N$7
  Top 0.203: R11.1 D8.C
ON/OFF  (via drill 0.35)
  Top 0.203: BRICK1.B 72.39,30.48 74.93,30.48 77.47,33.02 80.01,33.02 BRICK2.B 87.63,34.29 88.9,35.56 88.9,41.91 87.63,43.18 87.63,48.51 89.92,50.8 103.38,50.8 v106.93,54.36 R3.1
  Bottom 0.203: D4.C 107.56,55.37 106.33,55.37 | 106.33,55.37 Q2.3 | v106.93,54.36 106.68,54.36 106.33,54.7 106.33,55.37
ON/OFF_DRIVE
  Bottom 0.203: D3.A 100.58,53.09 99.06,54.61 | R2.2 99.06,54.61 | Q2.1 99.93,55.48 99.06,54.61
OR_DRIVE_A
  Top 0.203: U1.6 56.2,36.51 55.55,37.16 U1.2 51.74,37.16 50.8,38.1 U3.5 48.77,38.1 48.26,37.59 48.26,35.56 44.2,31.5 | Q3.1 44.2,31.5 | D5.C 41.91,33.14 42.55,33.14 44.19,31.5 44.2,31.5
OR_DRIVE_B  (via drill 0.35)
  Top 0.203: 113.03,34.29 113.54,33.78 113.54,32.51 112.52,31.5 110.24,31.5 109.22,30.48 109.22,29.21 | 113.03,34.29 Q4.1 | U4.5 110.49,27.94 109.22,29.21 | U2.6 103.56,28.27 104.09,27.73 105.08,27.73 U2.2 106.36,27.61 106.68,27.94 107.95,27.94 109.22,29.21 | D7.C 116.08,34.29 115.57,34.8 v115.57,35.56 | v113.03,35.56 113.03,34.29
  Bottom 0.203: v113.03,35.56 113.54,36.07 115.06,36.07 v115.57,35.56
REV_DRIVE  (via drill 0.35)
  Top 0.203: R1.1 82.55,59.69 v81.28,60.96
  Bottom 0.203: Q1.1 v81.28,60.96 81.4,60.96 D1.C
VCAPH_A
  Top 0.203: U1.7 60.02,37.16 60.96,38.1 60.96,39.37 59.69,40.64 C1.1
VCAPH_B
  Top 0.203: C2.1 111.76,26.67 112.27,26.16 112.27,25.65 111.76,25.15 98.55,25.15 97.79,25.91 97.79,26.67 98.73,27.61 U2.7
VCAPL_A
  Top 0.203: U1.1 52.37,37.8 52.07,38.1 52.07,39.37 53.34,40.64 C1.2
VCAPL_B
  Top 0.203: U2.1 106.39,26.96 106.68,26.67 C2.2

## Text on the board
tNames: ROV X13 Distribution v1 / Sam Kovnar / Read Hedl / Grant Geyer / January 9, 2021 | 12V_GND
tValues: +48V | 48V_GND | 48V_ETHERNET | +12V_B | LM74610 | LM74610 | +12V | 12V_GND | +12V_A
bValues: 12V_GND